# Altium PCB Isolation.PcbDoc
Units mm, origin at the board's own origin, x right, y up, seen from the top; angles counter-clockwise.
Board outline 99.06 x 99.19 mm, 2 copper layers (Top Layer, Bottom Layer); 15 components, 9 nets, 44 pads, 2 vias.
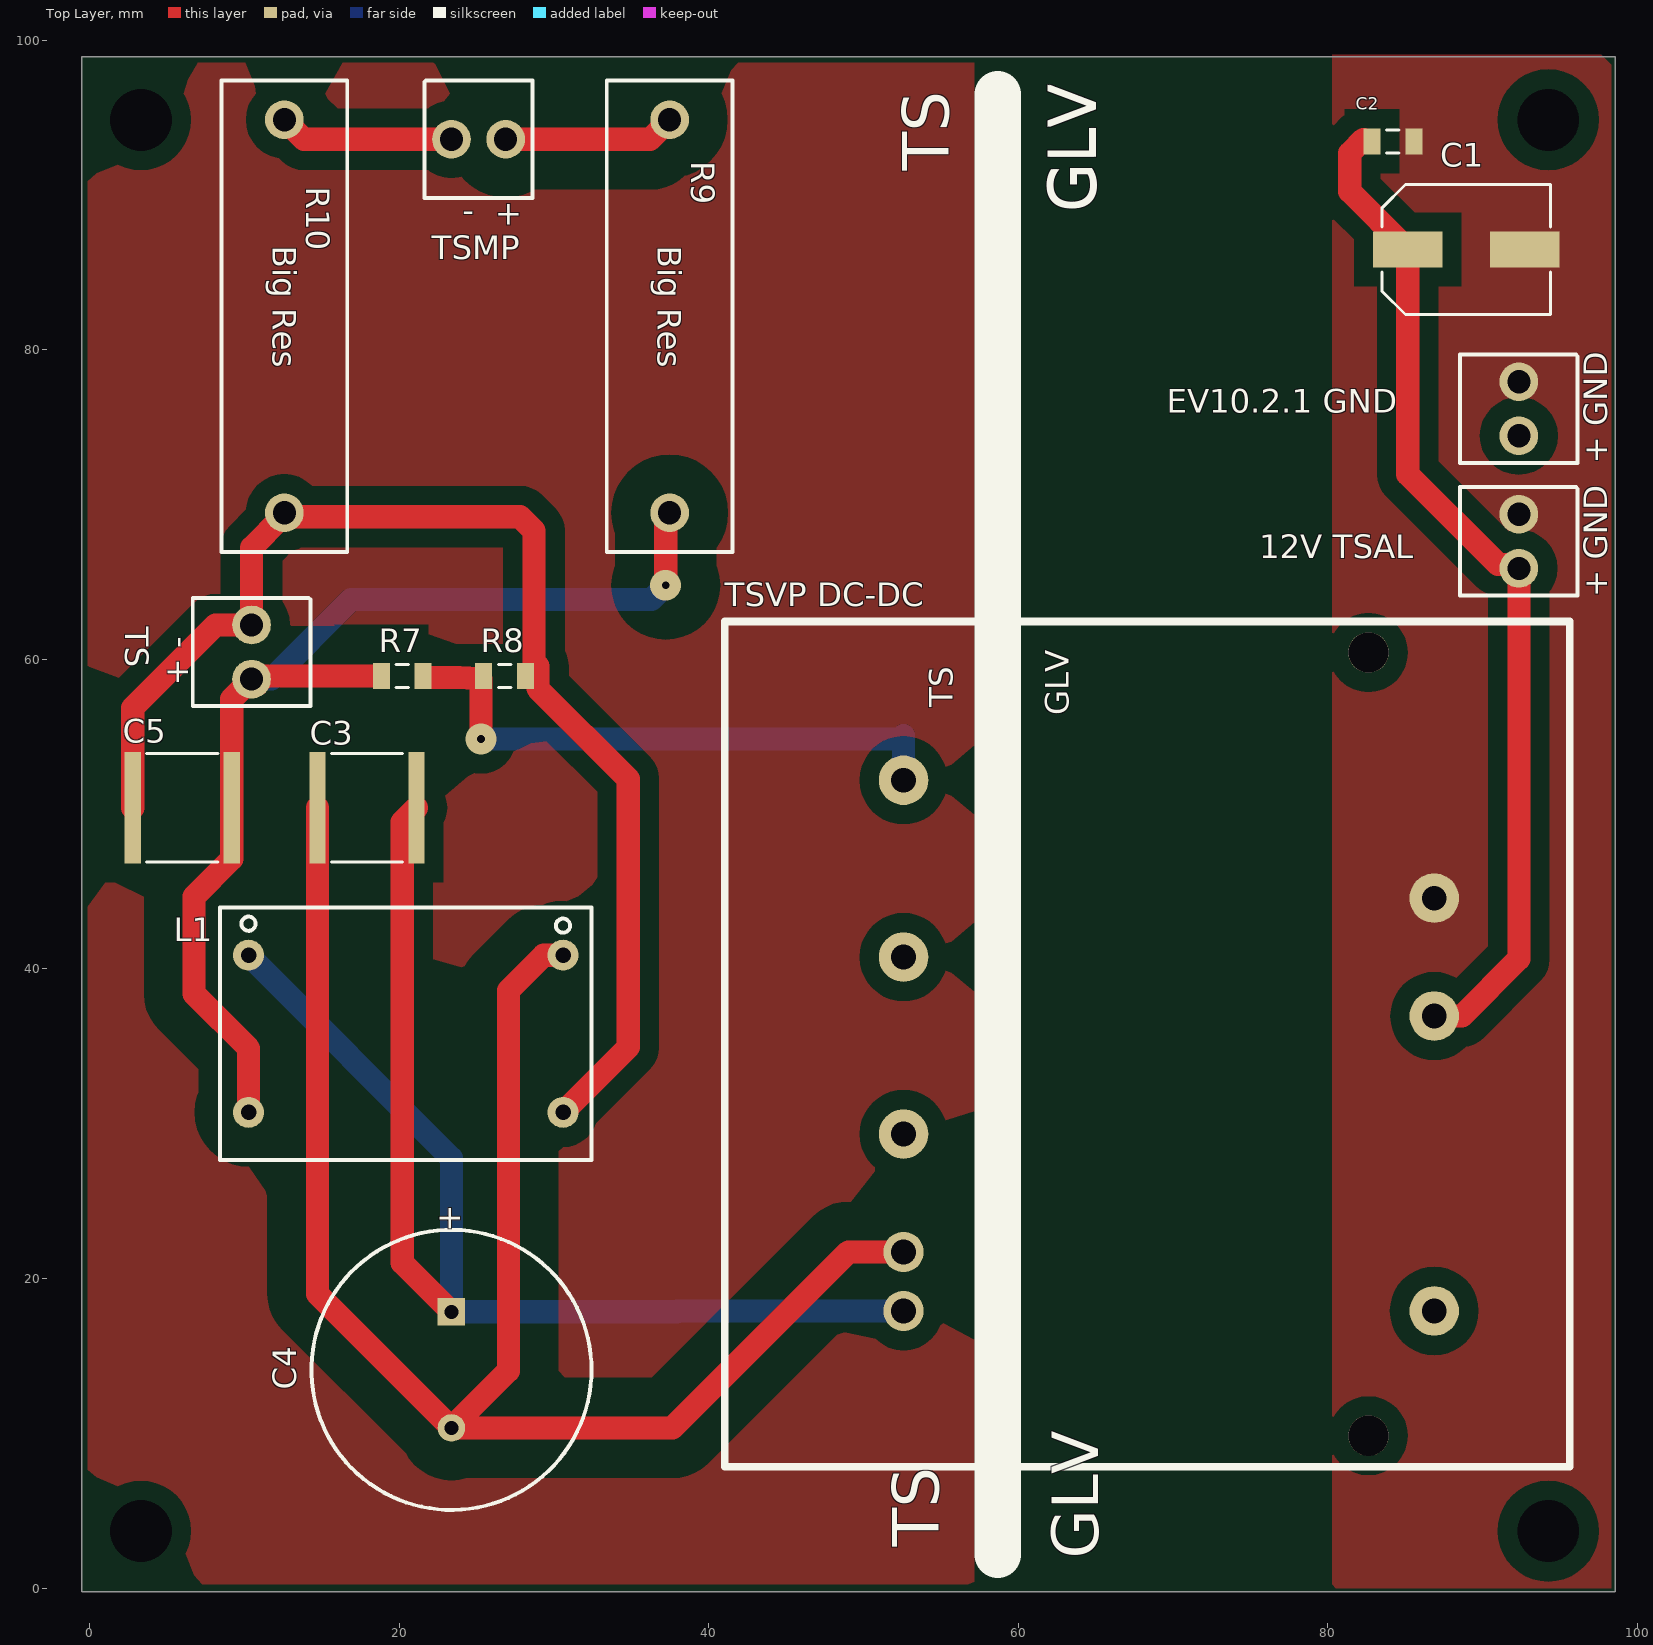
[diagram p0: Top Layer view]
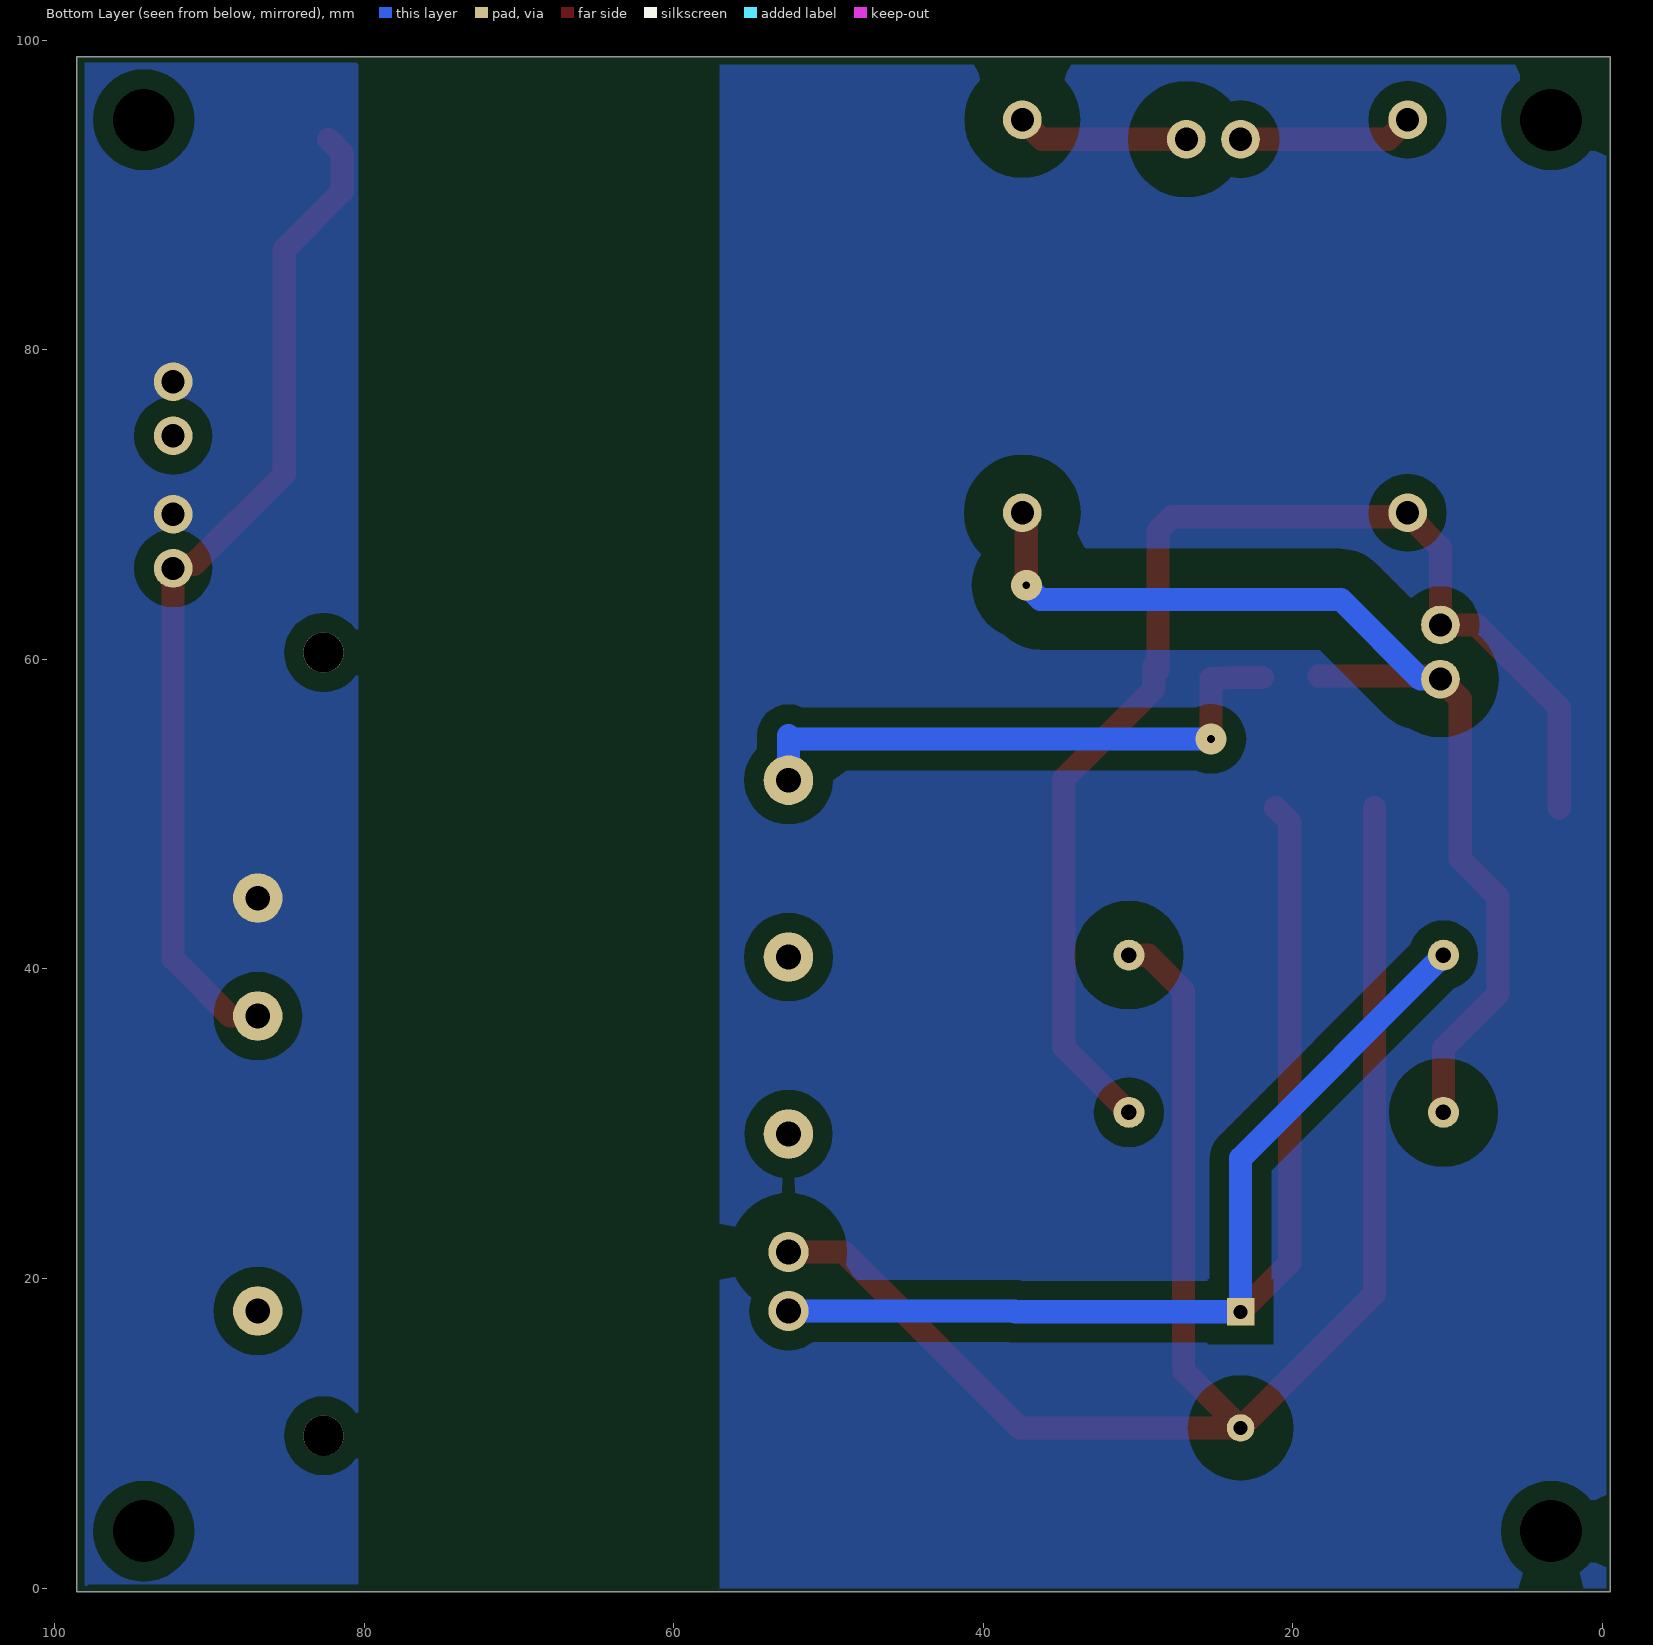
[diagram p1: Bottom Layer view, seen from below]

## Layer stack, top to bottom
Top Solder: solder mask 0.0102, Solder Resist, Dk 3.5
Top Layer: signal copper 0.0356
Dielectric 1: dielectric 0.32, FR-4, Dk 4.8
Bottom Layer: signal copper 0.0356
Bottom Solder: solder mask 0.0102, Solder Resist, Dk 3.5

## Board outline
-0.508,98.933 98.552,98.933 98.552,4.826 98.552,1.651 98.552,-0.254 -0.508,-0.254

## Design rules (kind name [scope] priority, off if disabled: settings)
Clearance Clearance_2 [InNamedPolygon('GND TS') vs InNet('NetR9_2')] p1: gap=2.5 ignorepadtopadclearanceinfootprint=FALSE except(0: Arc-Arc Arc-Track Arc-SMDPad Track-Track Track-SMDPad SMDPad-SMDPad)
Clearance Clearance_1 [InNamedPolygon('GND TS') vs InNet('NetC3_1')] p2: gap=2.5 ignorepadtopadclearanceinfootprint=FALSE
Clearance [InNamedPolygon('GND TS') vs InNet('TS+')] p3: gap=2.5 ignorepadtopadclearanceinfootprint=FALSE
Clearance "Plane rule 1" [All] p4: gap=1.25 ignorepadtopadclearanceinfootprint=TRUE except(0: Arc-Hole Track-Hole THPad-Hole Via-Hole Fill-Hole Poly-Hole Region-Hole Text-Hole; 0.254: Arc-Text Track-Text SMDPad-Text THPad-Text Via-Text Fill-Text Poly-Text Region-Text Text-Text; 0.5: SMDPad-SMDPad SMDPad-THPad SMDPad-Via SMDPad-Hole)
HoleSize [All] p1: absolutevalues=TRUE maxlimit=4 minlimit=0.025 maxpercent=80.000 minpercent=20.000
PlaneClearance [All] p1: clearance=0.1
PlaneConnect [All] p1: planeconnectstyle=Relief reliefexpansion=1.5 reliefentries=4 reliefconductorwidth=1.5 reliefairgap=1.5
PolygonConnect PolygonConnect_1 [All vs InNet('GND')] p1: thpad.connectstyle=Direct thpad.reliefconductorwidth=0.254 thpad.reliefentries=4 thpad.polygonreliefangle="90 Angle" thpad.airgapwidth=0.254 smdpad.connectstyle=Direct smdpad.reliefconductorwidth=0.254 smdpad.reliefentries=4 smdpad.polygonreliefangle="90 Angle" smdpad.airgapwidth=0.254 via.connectstyle=Relief via.reliefconductorwidth=0.254 via.reliefentries=4 via.polygonreliefangle="90 Angle" via.airgapwidth=0.254
PolygonConnect [All] p2: connectstyle=NoConnect reliefconductorwidth=0.254 reliefentries=4 polygonreliefangle="90 Angle" airgapwidth=0.254
RoomDefinition Isolation [InComponentClass('Outside Board Components')] p1: confinementstyle=ConfineIn formatcopy=TRUE lockcomponents=FALSE outline 100.33,1.397 134.112,1.397 134.112,35.687 100.33,35.687
RoutingVias [All] p1: holewidth=0.5 width=2 viastyle="Through Hole" minholewidth=0.5 minwidth=1.5 maxholewidth=1 maxwidth=2.5
SilkToSolderMaskClearance [IsPad] p1: minsilkscreentomaskgap=0.2 clearancetoexposedcopper=TRUE
SolderMaskExpansion [All] p1: expansion=0.102
UnpouredPolygon [All] p1: allowunpoured=TRUE allowshelved=TRUE
Width [All] p1: maxlimit=2.5 minlimit=1 preferedwidth=1.5
25 further rules are at their usual default settings.

## Components (designator, comment, footprint, x,y, rotation, side; value= is the part's Value field where it differs from the comment)
"12V TSAL" "+ GND" "2 Pin Screw Terminal" 96.137,64.135 r90 top (schematic designator GLV)
C1 "220uF" EEE-1VA221UP 88.935,86.487 r0 top
C2 "C0603" C1206 84.201,93.472 r180 top value=0.1uF
C3 "C0603" "2225 Package" 17.907,50.419 r0 top value=1uF
C4 "100uF" NichiconCAP 23.368,14.097 r270 top
C5 "C0603" "2225 Package" 5.969,50.419 r0 top value=1uF
"EV10.2.1 GND" "+ GND" "2 Pin Screw Terminal" 96.137,72.699 r90 top
L1 "10mH" 52106C 30.578,40.894 r180 top
R7 "" C1206 20.193,58.928 r180 top value=1.26M
R8 "20k" C1206 26.797,58.928 r180 top
R9 "10K 5W" "Res THRU Hole 10k 5W" 37.465,94.873 r270 top
R10 "10K 5W" "Res THRU Hole 10k 5W" 12.573,94.873 r270 top
TS "+ -" "2 Pin Screw Terminal" 14.252,56.98 r90 top
TSMP "+  -" "2 Pin Screw Terminal" 28.618,97.413 r180 top
"TSVP DC-DC" "RUW15SL 12C" "RUW15SL 12C" 43.018,60.447 r0 top

## Footprints (in the part's own frame and the unit in brackets; to place one, negate y for a bottom-side part, rotate by r counter-clockwise, add the part's x,y. Pads: shape width x height; smd on the part's side, far side on the other; paste and mask are expansions set on the pad)
"2 Pin Screw Terminal" [mm] "pitch 3.5mm, hole 2.5mm"
  round 2.5 hole 1.5: 1(1.75,3.8) 2(5.25,3.8)
  silkscreen extent 0,0 7,7.6
"2225 Package" [mm]
  rect 1.05x7.2 smd: 1(-3.2,0) 2(3.2,0)
  silkscreen extent -2.3,-3.5 2.3,3.5, body extent -2.67,-3.05 2.67,3.05, height 2.18
52106C [mm] "MuRata 10mH Common Mode Choke"
  round 2 hole 1: 1(0,0) 2(20.32,0) 3(20.32,10.16) 4(0,10.16)
  silkscreen extent -1.84,-3.07 22.16,13.23
C1206 [mm] "Chip Capacitor, Body 3.2x1.6mm, IPC High Density"
  rect 1.1x1.7 smd: 1(-1.35,0) 2(1.35,0)
  silkscreen extent -0.4,-0.75 0.4,0.75, body extent -1.7,-0.9 1.7,0.9, height 1.3
EEE-1VA221UP [mm] "Panasonic Aluminum Electrolytic Capacitor, 220uF, 35V, 20%"
  rect 4.5x2.3 smd: 1(-3.775,0) 2(3.775,0)
  silkscreen extent -5.45,-4.2 5.45,4.2, body extent -5.45,-4.25 5.45,4.25, height 10.5
NichiconCAP [mm]
  rect 1.778x1.778 hole 0.9: 1(-3.75,0)
  round 1.778 hole 0.9: 2(3.75,0)
  silkscreen extent -9.05,-9.05 9.05,9.05
"Res THRU Hole 10k 5W" [mm]
  round 2.5 hole 1.5: 1(25.4,0) 2(0,0)
  silkscreen extent -2.54,-4.06 27.94,4.06
"RUW15SL 12C" [mm] "MuRata RC-DC"
  round 3.2 hole 1.6: 1(9.56,-8.25)
  round 3.2 / inner round 2.6 / far side round 3.2 hole 1.6: 2(9.56,-19.68) 3(9.56,-31.11) 6(43.85,-42.54) 7(43.85,-23.49) 8(43.85,-15.87)
  round 2.6 hole 1.6: 4(9.56,-38.73) 5(9.56,-42.54)
  round 2.6 hole 2.6 unplated: B(39.6,0) D(39.6,-50.6)
  silkscreen extent -2,-52.6 52.6,2, body extent 0,-50.6 50.61,0, height 20.5

## Part data
"12V TSAL" "EV10.2.1 GND" TS TSMP: library part "Header 2", "Header, 2-Pin", Supplier Part Number 1=277-1721-ND, LatestRevisionDate=17-Jul-2002, LatestRevisionNote="Re-released for DXP Platform.", Publisher="Altium Limited"
C1: library part "Cap Pol1", "Panasonic Electrolytic 35V, 20% EEE-1VA221UP", Supplier Part Number 1=PCE3955CT-ND
C2: "C0603C104K3RACTU", PackageDocument=Mar-2001, Supplier Part Number 1=399-1249-1-ND, Code_IPC="1608 [0603]", Code_JEITA=0603, ComponentLink1Description="Manufacturer Link", ComponentLink1URL=http://www.kemet.com/, ComponentLink2Description=Datasheet, ComponentLink2URL=http://www.kemet.com/kemet/web/homepage/kechome.nsf/vapubfilesname/F3102TA.pdf/$file/F3102TA.pdf, DatasheetDocument=Mar-2001, LatestRevisionDate=19-Mar-2004, LatestRevisionNote="Silkscreen size reduced.", Note="Footprint corresponds to dimensions for bulk cassette packaging. This case size has tightened tolerances.", PackageReference=0603, Published=17-Jul-2002, Publisher="Altium Limited"
C3: "C0603C104K3RACTU", PackageDocument=Mar-2001, Supplier Part Number 1=720-1136-1-ND, Code_IPC="1608 [0603]", Code_JEITA=0603, ComponentLink1Description="Manufacturer Link", ComponentLink1URL=http://www.kemet.com/, ComponentLink2Description=Datasheet, ComponentLink2URL=http://www.kemet.com/kemet/web/homepage/kechome.nsf/vapubfilesname/F3102TA.pdf/$file/F3102TA.pdf, DatasheetDocument=Mar-2001, LatestRevisionDate=19-Mar-2004, LatestRevisionNote="Silkscreen size reduced.", Note="Footprint corresponds to dimensions for bulk cassette packaging. This case size has tightened tolerances.", PackageReference=0603, Published=17-Jul-2002, Publisher="Altium Limited"
C4: library part "Cap Pol1", "Nichicon 200V 100uF TH Capacitor  UCA2D101MHD6TN", Suplier Part Number 1=493-13261-1-ND
C5: "C0603C104K3RACTU", Supplier Part Number 1=720-1136-1-ND
L1: library part "Trans Ideal", "MuRata 52106C Common Choke", Supplier Part Number 1=811-1257-ND, Code_IEC=1005, Code_JEITA=0402, LatestRevisionDate=29-May-2009, LatestRevisionNote="IPC-7351 Footprint Added.", PackageDescription="Chip Inductor", PackageReference=0402-A, Published=8-Jun-2000, Publisher="Altium Limited"
R7: library part Res1, "Resistor", Supplier Part Number 1=RMCF1206FT1M27CT-ND, LatestRevisionDate=17-Jul-2002, LatestRevisionNote="Re-released for DXP Platform.", PackageDescription="Axial Device, Thru-Hole; 2 Leads; 0.3 in Pin Spacing", PackageReference=AXIAL-0.3, Published=8-Jun-2000, Publisher="Altium Limited"
R8: library part ERJ6EN, "Precision Thick Film Chip Resistor, 10 Ohm to 2.2M Ohm Range, 1% Tolerance, 0805 Size, 0.1 W", PackageDocument=Mar-2003, Supplier Part Number 1=RNCP1206FTD20K0CT-ND, Code_IPC="2012 [0805]", ComponentLink1Description="Manufacturer Link", ComponentLink1URL=http://www.panasonic.com/industrial/components/resistive_products.htm, ComponentLink2Description=Datasheet, ComponentLink2URL=http://www.panasonic.com/industrial/components/pdf/AOA0000CE2.pdf, LatestRevisionDate=19-Mar-2004, LatestRevisionNote="Silkscreen size reduced.", PackageReference=6-0805, Published=17-Dec-2003, Publisher="Altium Limited"
R9 R10: library part "Resistor 10kOhm 5W", Supplier Part Number 1=PPC5W10.0KCT-ND
"TSVP DC-DC": Supplier Part Number 1=811-2783-ND, Note="5kV Isolation"

## Free pads (board coordinates)
  round 0 hole 4: "screw hole"(3.302,3.683) "Screw hole"(3.302,94.869) "Screw hole"(94.234,3.683) "Screw hole"(94.234,94.869)

## Via types
v1: diameter 2, hole 0.5, Top Layer to Bottom Layer, 2 vias

## Nets (pads, with @x,y where several pads share a name; then routed paths per layer and width w, separated by ;. In a path a pad name is that pad's centre, name@x,y a point inside that pad or via, vN(x,y) a via of type N, cw(c..) or ccw(c..) an arc to the next point about the centre after c; other vN are vias at no path point)
GND: "12V TSAL.2" "EV10.2.1 GND.2" "TSVP DC-DC.8" C1.2 C2.1
NetC3_1: "TSVP DC-DC.4" C3.1 C4.2 L1.1 | length 111.8
  Top Layer w1.5: C3.1 14.707,19.008 C4.2 ; L1.1 29.337,40.894 27.051,38.608 27.051,14.03 C4.2 ; 52.578,21.717 49.022,21.717 37.652,10.347 C4.2
NetC3_2: "TSVP DC-DC.5" C3.2 C4.1 L1.2 | length 92
  Top Layer w1.5: C3.2 20.193,49.505 20.193,21.022 C4.1
  Bottom Layer w1.5: L1.2 23.368,27.784 C4.1 37.922,17.847 37.982,17.907 52.578,17.907
NetR7_1: "TSVP DC-DC.1" R7.1 R8.2 | length 37.5
  Top Layer w1.5: R7.1@21.971,58.841 23.847,58.841 25.273,58.754 v1(25.273,54.864)
  Bottom Layer w1.5: v1(25.273,54.864) 52.349,54.864 52.578,55.093 52.578,52.197
NetR9_2: R9.2 TSMP.1 | length 11.1
  Top Layer w1.5: TSMP.1 36.205,93.613 R9.2
NetR10_2: R10.2 TSMP.2 | length 11.3
  Top Layer w1.5: R10.2 13.833,93.613 TSMP.2
TS+: C5.2 L1.3 R7.2 R9.1 TS.1 | length 72.8
  Top Layer w1.5: L1.3 10.258,34.871 6.731,38.398 6.731,44.679 9.169,47.117 C5.2 9.169,57.447 TS.1 ; TS.1@10.795,58.387 11.336,58.928 18.288,58.928 ; v1(37.211,64.795) R9.1@37.211,69.596
  Bottom Layer w1.5: TS.1 11.74,58.73 16.891,63.881 36.297,63.881 v1(37.211,64.795)
TS-: C5.1 L1.4 R8.1 R10.1 TS.2 | length 82.8
  Top Layer w1.5: C5.1 2.769,56.871 8.128,62.23 9.779,62.23 10.452,62.903 10.452,67.221 12.446,69.215 27.798,69.215 28.702,68.311 28.702,59.817 ; 28.702,59.306 28.702,59.817 ; L1.4 34.798,34.954 34.798,52.277 28.956,58.119 28.956,59.563 28.702,59.817
"TSVP 12V": "12V TSAL.1" "TSVP DC-DC.7" C1.1 C2.2 | length 65.5
  Top Layer w1.5: 82.296,93.599 81.407,92.71 81.407,90.24 C1.1 85.16,71.966 90.991,66.135 92.087,66.135 92.337,65.885 92.337,40.648 88.646,36.957 86.868,36.957
pads on no net: "EV10.2.1 GND.1" "TSVP DC-DC.2" "TSVP DC-DC.3" "TSVP DC-DC.6" "TSVP DC-DC.B" "TSVP DC-DC.D"

## Polygon pours and split planes (outlines as drawn)
GND on Top Layer "GND TS" (solid, pour order 6): 0.127,98.679 0.254,98.552 57.15,98.552 57.15,-0.127 56.769,0.254 -0.127,0.254 -0.127,98.425
GND on Top Layer "GND" (solid, pour order 0): 80.264,99.06 97.663,99.06 98.298,98.425 98.298,0 80.518,0 80.264,0.254
GND on Bottom Layer "GND" (solid, pour order 2): 80.518,98.552 98.044,98.552 98.044,0 97.79,0.254 80.391,0.254 80.391,98.552 80.518,98.679
GND on Bottom Layer "GND TS" (solid, pour order 4): -0.254,98.425 57.023,98.425 57.023,0 -0.254,0

## Silkscreen, mask and mechanical layers (free items; w line width, h text height)
Top Overlay:
  lines w3: 58.674,2.159 58.674,96.52
  text "TS" at 55.499,91.567 h3 r90
  text "GLV" at 64.897,88.9 h3 r90
  text "GLV" at 65.024,88.9 h3 r90
  text "TS" at 55.753,56.896 h1.52 r90
  text "GLV" at 63.246,56.388 h1.52 r90
  text "TS" at 54.864,2.667 h3 r90
  text "GLV" at 65.151,1.905 h3 r90
Bottom Overlay:
Mechanical 1:
  lines w0.254: -0.381,0 98.298,0 98.298,98.679 -0.381,98.679 -0.381,0

## Text inside footprints (layer, text, board x,y; h text height)
C4: Top Overlay "+" at 22.606,24.765 h1.52 r270
R9: Top Overlay "Big Res" at 36.703,86.745 h1.52 r270
R10: Top Overlay "Big Res" at 11.811,86.745 h1.52 r270